# EAGLE board XMICRO-SERIAL Shield V1.0 (EAGLE 6.3)
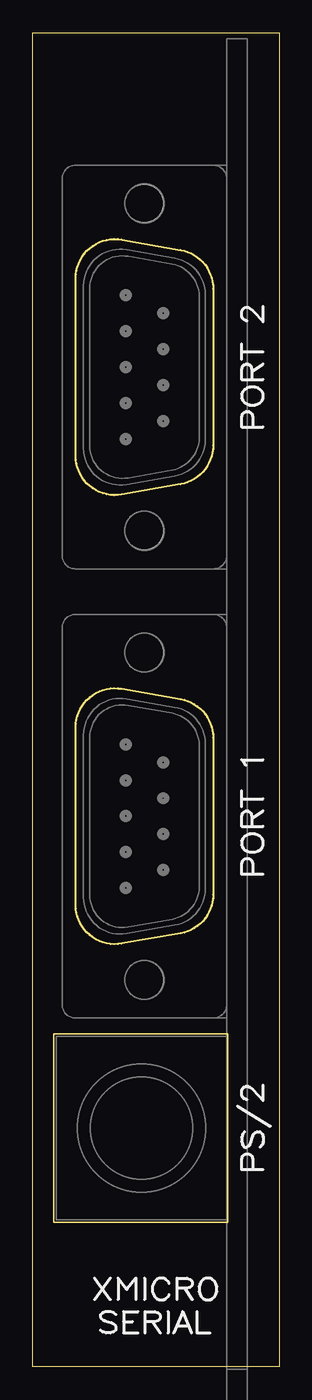
[diagram p0: board, top side]
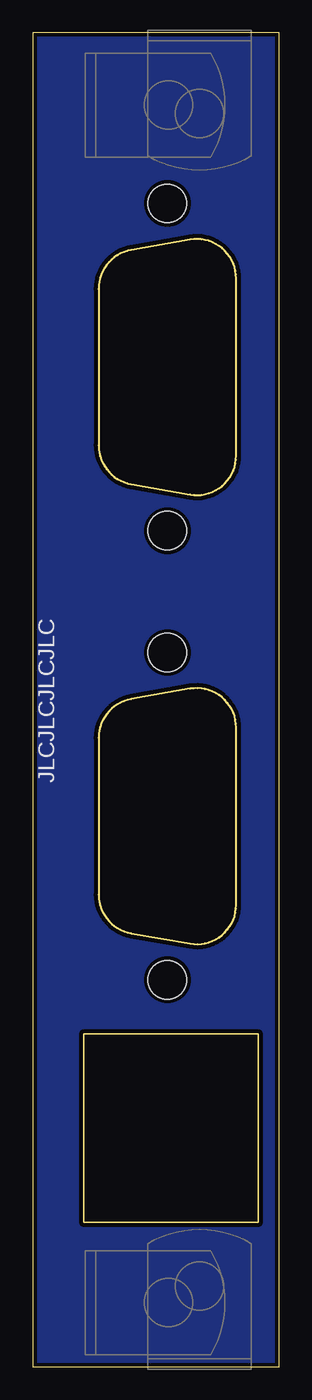
[diagram p1: board, bottom side, seen from below]

Size 18.8 x 101.85 mm. Coordinates in mm from the lower left corner, seen from the top.
Outline: 0,0 0,101.85 18.8,101.85 18.8,0 0,0
Copper layers (1*16): Top 0.035mm / dielectric 1.5mm / Bottom 0.035mm
Design rules "JLCPCB Custom": minimum track width 5mil, minimum drill 0.3mm, track to track 5mil, track to pad 8mil, pad to pad 8mil, via to via 8mil, smd to smd 5mil, copper to edge 0.3mm, drill to drill 0.3mm, minimum pad ring 10mil, minimum via ring 8mil, stop-mask expansion 0mil, vias tented up to drill 25mil, thermal gap 10mil
Net classes: 2 CHASSIS: width 0.254 mm, clearance 0.762 mm to class 0, clearance 0.762 mm to class 1

## Footprints (pad centres in the part's own frame; a part is rotated, then mirrored left to right if it is on the bottom)
DE-M = hole 2.946: -12.495,6.275; 12.495,6.275

## Placement (x,y rotation side)
E$1  [614-HN]  6.06,-0.19 0 bottom
E$2  [614-HN]  6.06,102.04 180 bottom
E$3  [614-HN]  14.8,4.89 270 bottom
E$4  [614-HN]  14.8,96.33 270 bottom
E$5  [DE-M]  14.8,76.33 90 top
E$6  [DE-M]  14.8,42.04 90 top
E$7  [MDIN-SQ]  14.8,18.22 90 top

## Library data of the parts
E$1-E$7 = panel

## Tracks (layer width: path | path; a pad name or v marks a point on that pad's centre or on a via)
S$162
  pour Bottom: 0,101.85 18.8,101.85 18.8,0 0,0

## Text on the board
bPlace: JLCJLCJLCJLC